# Altium PCB PCB1.PcbDoc
Units mm, origin at the board's own origin, x right, y up, seen from the top; angles counter-clockwise.
Board outline 152.4 x 101.6 mm, 2 copper layers (Top Layer, Bottom Layer); 35 components, 34 nets, 198 pads, 13 vias.
Unrouted connection lines stored in the file: 1.
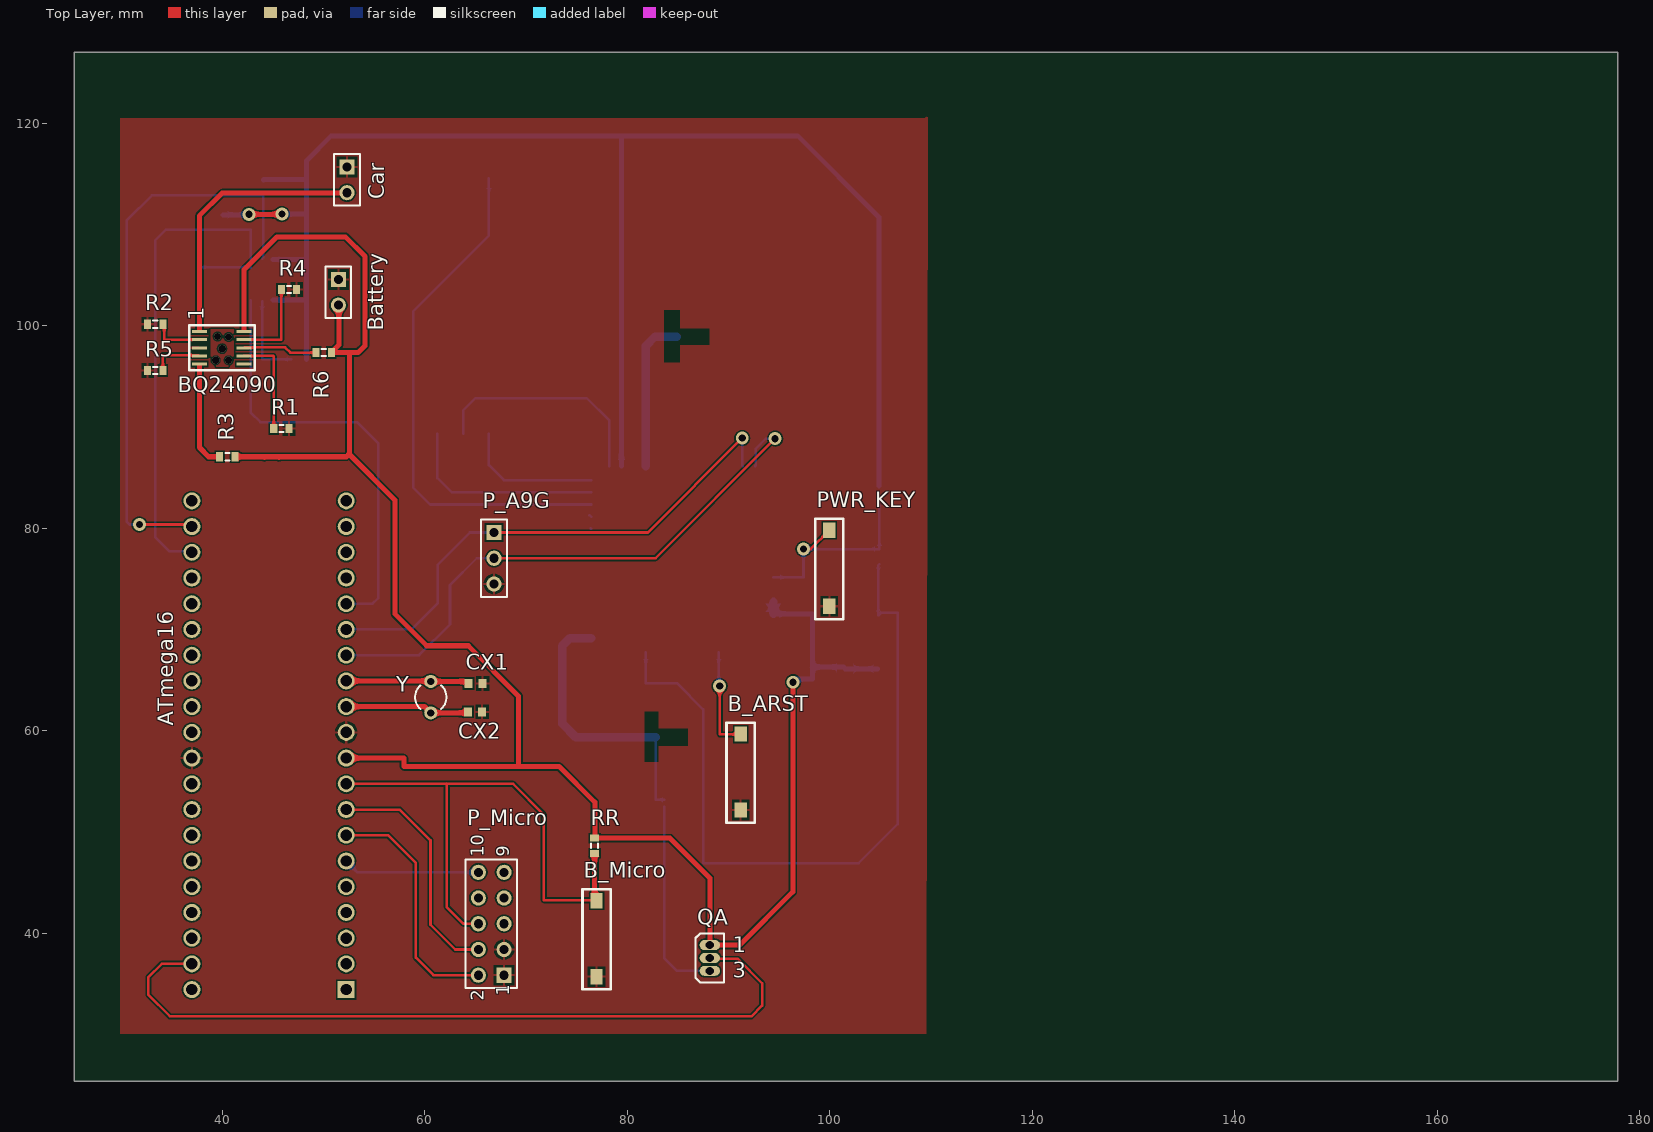
[diagram p0: Top Layer view]
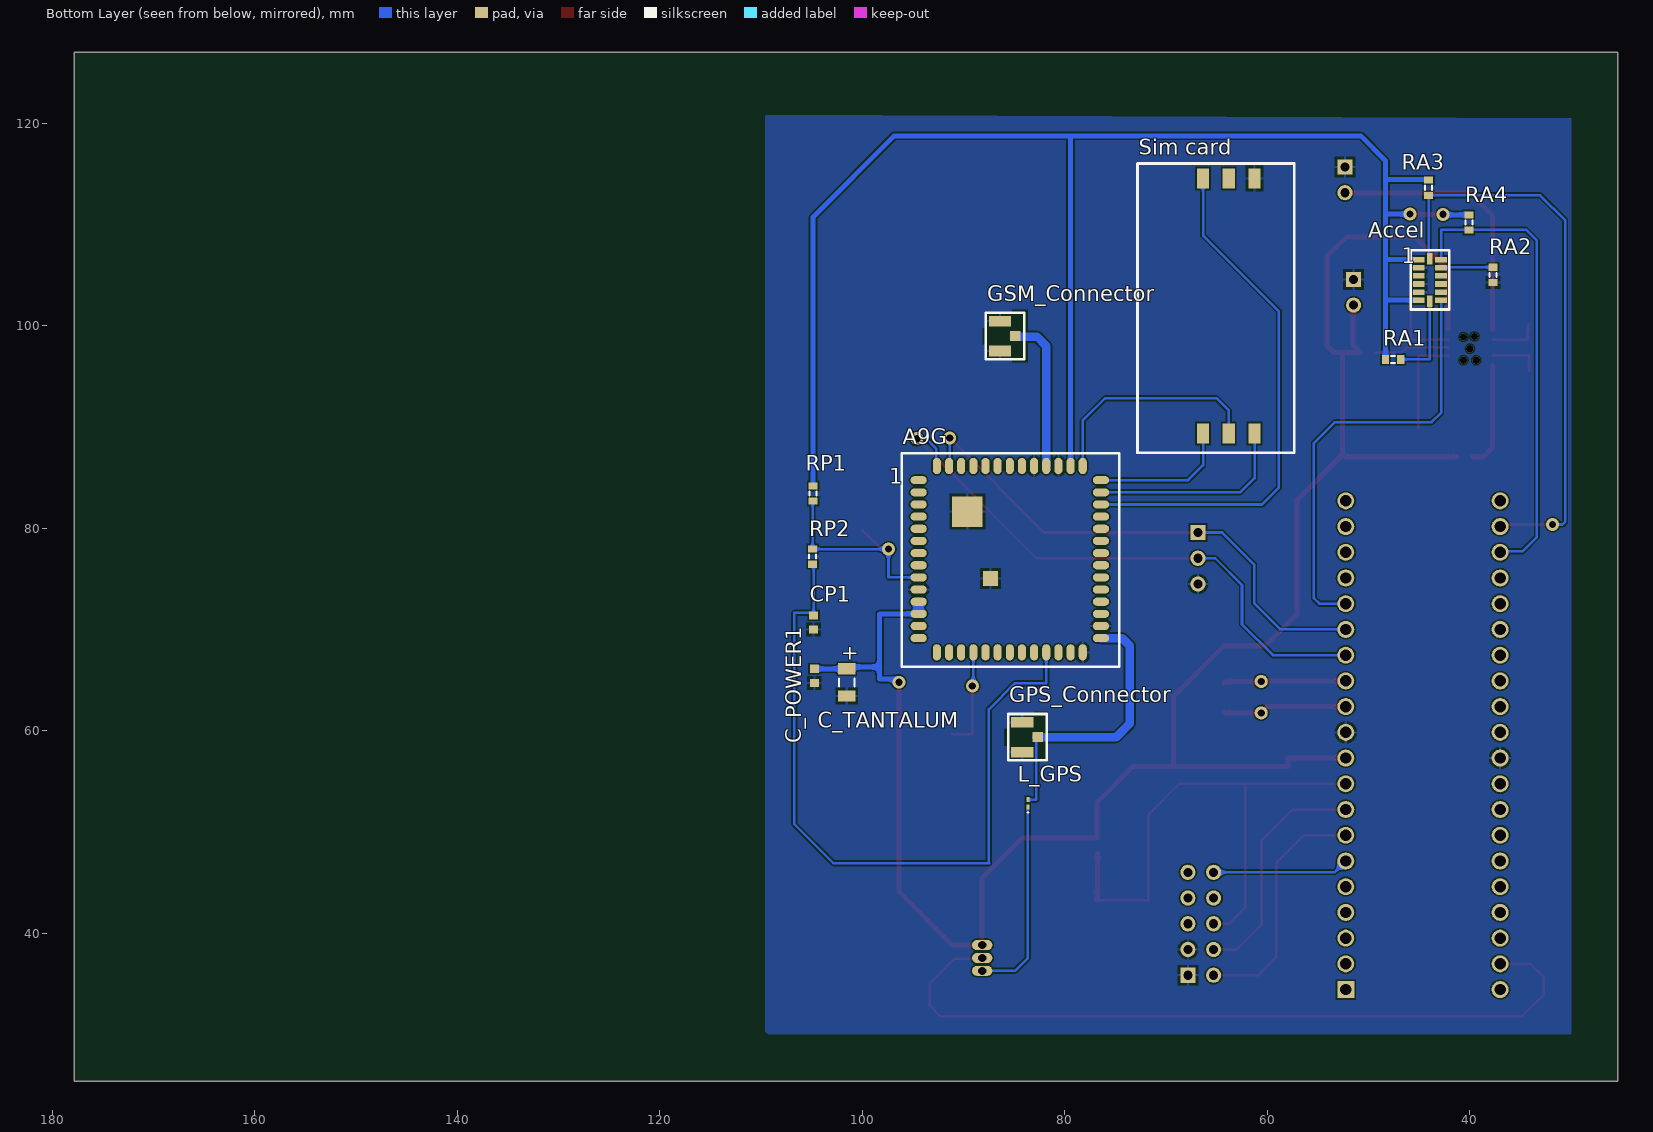
[diagram p1: Bottom Layer view, seen from below]

## Layer stack, top to bottom
Top Solder: solder mask 0.0102, Solder Resist, Dk 3.5
Top Layer: signal copper 0.0356
Dielectric 1: dielectric 0.32, FR-4, Dk 4.8
Bottom Layer: signal copper 0.0356
Bottom Solder: solder mask 0.0102, Solder Resist, Dk 3.5

## Board outline
25.4,25.4 177.8,25.4 177.8,127 25.4,127

## Design rules (kind name [scope] priority, off if disabled: settings)
Clearance [All] p1: gap=0.15 ignorepadtopadclearanceinfootprint=TRUE
PolygonConnect [All] p1: connectstyle=Relief reliefconductorwidth=0.254 reliefentries=4 polygonreliefangle="90 Angle" airgapwidth=0.254
RoutingVias [All] p1: holewidth=0.711 width=1.27 viastyle="Through Hole" minholewidth=0.711 minwidth=1.27 maxholewidth=0.711 maxwidth=1.27
SolderMaskExpansion [All] p1: expansion=0.102
Width [All] p1: maxlimit=0.85 minlimit=0.254 preferedwidth=0.5
30 further rules are at their usual default settings.

## Components (designator, comment, footprint, x,y, rotation, side; value= is the part's Value field where it differs from the comment)
A9G "Component_1" PCBComponent_1#1 106.763,73.828 r180 bottom
Accel "ADXL345" PCBComponent_1#2 43.942,104.521 r180 bottom
ATmega16 "MIC" DIP254P1524X482-40 37.01,82.71 r180 top
B_ARST "Component_1" PCBComponent_1#3 91.2,59.675 r270 top
B_Micro "Component_1" PCBComponent_1#3 76.975,43.225 r270 top
Battery "Header 2" HDR1X2 51.475,104.575 r270 top
BQ24090 "BQ24090" PCBComponent_1#4 37.759,99.423 r270 top
C_POWER1 "Cap Semi" 1608[0603] 104.725,65.425 r90 bottom value=100pF
C_TANTALUM "Cap Semi" C1206 101.525,64.775 r90 bottom value=100miF
Car "Header 2" HDR1X2 52.325,115.675 r270 top
CP1 "Cap Semi" 1608[0603] 104.8,70.7 r90 bottom value=100nF
CX1 "Cap Semi" 1608[0603] 65.025,64.675 r180 top value=22pF
CX2 "Cap Semi" 1608[0603] 64.975,61.875 r180 top value=22pF
GPS_Connector "Component_1" PCBComponent_1#5 82.675,59.375 r90 bottom
GSM_Connector "Component_1" PCBComponent_1#5 84.875,98.975 r90 bottom
L_GPS "Inductor" 0603 83.65,52.85 r90 bottom value=100nH
P_A9G "Header 1" HDR1X3 66.85,79.58 r270 top
P_Micro "Header 5X2" HDR2X5 67.84,35.87 r90 top
PWR_KEY "Component_1" PCBComponent_1#3 99.95,79.8 r270 top
QA "MOSFET-N" E3 88.15,37.57 r0 top
R1 "Res3" J1-0603 45.842,89.86 r0 top value=10K
R2 "Res3" J1-0603 33.396,100.147 r0 top value=1.5K
R3 "Res3" J1-0603 40.508,87.066 r180 top value=1K
R4 "Res3" J1-0603 46.604,103.576 r0 top value=10K
R5 "Res3" J1-0603 33.396,95.575 r0 top value=2K
R6 "Res3" J1-0603 50.033,97.353 r0 top value=2K
RA1 "Res3" J1-0603 47.575,96.675 r180 bottom value=1K
RA2 "Res3" J1-0603 37.719,105.029 r270 bottom value=4.7K
RA3 "Res3" J1-0603 44.075,113.625 r90 bottom value=4.7K
RA4 "Res3" J1-0603 40.1,110.2 r90 bottom value=4.7K
RP1 "Res3" J1-0603 104.85,83.425 r90 bottom value=10K
RP2 "Res3" J1-0603 104.9,77.2 r90 bottom value=1K
RR "Res3" J1-0603 76.775,48.65 r90 top value=10K
"Sim card" "Sim Card Socket" PCBComponent_1#6 61.26,89.35 r90 bottom
Y "XTAL_8MHz" R38 60.6,63.325 r0 top

## Footprints (in the part's own frame and the unit in brackets; to place one, negate y for a bottom-side part, rotate by r counter-clockwise, add the part's x,y. Pads: shape width x height; smd on the part's side, far side on the other; paste and mask are expansions set on the pad)
0603 [mm] "Chip Inductor, Body 0.6x0.3mm, IPC High Density"
  rect 0.5x0.3 smd: 1(-0.35,0) 2(0.35,0)
  silkscreen extent -0.9,-0.05 -0.9,0.05, body extent -0.33,-0.18 0.33,0.18, height 0.55
1608[0603] [mm] "Chip Capacitor, Body 1.6x0.8mm, IPC High Density"
  rect 0.8x0.9 smd: 1(-0.7,0) 2(0.7,0)
  body extent -0.87,-0.48 0.87,0.48, height 1.3
C1206 [mm] "Chip Capacitor, Body 3.2x1.6mm, IPC High Density"
  rect 1.1x1.7 smd: 1(-1.35,0) 2(1.35,0)
  silkscreen extent -0.4,-0.75 0.4,0.75, body extent -1.7,-0.9 1.7,0.9, height 1.3
DIP254P1524X482-40 [mil]
  rect 66x66 hole 44: 1(-600,1900)
  round 66 hole 44: 2(-600,1800) 3(-600,1700) 4(-600,1600) 5(-600,1500) 6(-600,1400) 7(-600,1300) 8(-600,1200) 9(-600,1100) 10(-600,1000) 11(-600,900) 12(-600,800) 13(-600,700) 14(-600,600) 15(-600,500) 16(-600,400) 17(-600,300) 18(-600,200) 19(-600,100) 20(-600,0) 21(0,0) 22(0,100) 23(0,200) 24(0,300) 25(0,400) 26(0,500) 27(0,600) 28(0,700) 29(0,800) 30(0,900) 31(0,1000) 32(0,1100) 33(0,1200) 34(0,1300) 35(0,1400) 36(0,1500) 37(0,1600) 38(0,1700) 39(0,1800) 40(0,1900)
E3 [mm] "TO, Flat Index; 3 In-Line, Axial Leads; Body Dia. 4.6mm; Lead Dia. 0.5 mm (max)"
  oval 2x1 hole 0.8: 1(0,1.27) 2(0,0) 3(0,-1.27)
  silkscreen extent -1.41,-2.41 1.41,2.41
HDR1X2 [mm] "Connector; Header; 2 Position"
  rect 1.5x1.5 hole 0.9: 1(0,0)
  round 1.5 hole 0.9: 2(2.54,0)
  silkscreen extent -1.27,-1.27 3.81,1.27
HDR1X3 [mm] "Connector; Header; 3 Position"
  rect 1.5x1.5 hole 0.9: 1(0,0)
  round 1.5 hole 0.9: 2(2.54,0) 3(5.08,0)
  silkscreen extent -1.27,-1.27 6.35,1.27
HDR2X5 [mm] "Connector; Header; 5x2 Position"
  rect 1.5x1.5 hole 0.9: 1(0,0)
  round 1.5 hole 0.9: 2(0,2.54) 3(2.54,0) 4(2.54,2.54) 5(5.08,0) 6(5.08,2.54) 7(7.62,0) 8(7.62,2.54) 9(10.16,0) 10(10.16,2.54)
  silkscreen extent -1.27,-1.27 11.43,3.81
J1-0603 [mm] "Chip Resistor, Body 1.6x0.8mm, IPC High Density"
  rect 0.7x0.9 smd: 1(-0.75,0) 2(0.75,0)
  silkscreen extent -0.2,-0.35 0.2,0.35, body extent -0.85,-0.48 0.85,0.48, height 0.9
PCBComponent_1#1 [mm]
  oval 1.6x0.8 smd: 1(12.338,10.922) 2(12.338,9.722) 3(12.338,8.522) 4(12.338,7.322) 5(12.338,6.122) 6(12.338,4.922) 7(12.338,3.722) 8(12.338,2.522) 9(12.338,1.322) 10(12.338,0.122) 11(12.338,-1.078) 12(12.338,-2.278) 13(12.338,-3.478) 14(12.338,-4.678) 28(30.338,-4.678) 29(30.338,-3.478) 30(30.338,-2.278) 31(30.338,-1.078) 32(30.338,0.122) 33(30.338,1.322) 34(30.338,2.522) 35(30.338,3.722) 36(30.338,4.922) 37(30.338,6.122) 38(30.338,7.322) 39(30.338,8.522) 40(30.338,9.722) 41(30.338,10.922)
  oval 0.8x1.6 smd: 15(14.138,-6.078) 16(15.338,-6.078) 17(16.538,-6.078) 18(17.738,-6.078) 19(18.938,-6.078) 20(20.138,-6.078) 21(21.338,-6.078) 22(22.538,-6.078) 23(23.738,-6.078) 24(24.938,-6.078) 25(26.138,-6.078) 26(27.338,-6.078) 27(28.538,-6.078) 42(28.538,12.322) 43(27.338,12.322) 44(26.138,12.322) 45(24.938,12.322) 46(23.738,12.322) 47(22.538,12.322) 48(21.338,12.322) 49(20.138,12.322) 50(18.938,12.322) 51(17.738,12.322) 52(16.538,12.322) 53(15.338,12.322) 54(14.138,12.322)
  rect 3x3 smd: 55(17.138,7.822)
  rect 1.5x1.5 smd: 56(19.438,1.222)
  silkscreen extent 10.67,-7.49 32.13,13.59
PCBComponent_1#2 [mm]
  rect 1.145x0.55 smd: 1(-1.098,2) 2(-1.098,1.2) 3(-1.098,0.4) 4(-1.098,-0.4) 5(-1.098,-1.2) 6(-1.098,-2) 8(1.097,-2) 9(1.098,-1.2) 10(1.098,-0.4) 11(1.098,0.4) 12(1.098,1.2) 13(1.098,2)
  rect 0.55x1.145 smd: 7(0,-2.097) 14(0,2.097)
  silkscreen extent -1.91,-2.92 1.91,2.92
PCBComponent_1#3 [mm]
  rect 1.5x1.2 smd: 1(0,0) 2(7.5,0)
  silkscreen extent -1.14,-1.4 8.76,1.4
PCBComponent_1#4 [mm]
  rect 0.3x1.45 smd mask+0.05: 1(0,0) 2(0.8,0) 3(1.6,0) 4(2.4,0) 5(3.2,0) 6(3.2,4.4) 7(2.4,4.4) 8(1.6,4.4) 9(0.8,4.4) 10(0,4.4)
  silkscreen extent -0.63,-1.02 3.81,5.46
PCBComponent_1#5 [mm]
  rect 1.05x2.2 smd: 1(-1.475,1.525) 2(1.475,1.525)
  rect 1x1.05 smd: 3(0,0)
  silkscreen extent -2.29,-0.89 2.29,2.92
PCBComponent_1#6 [mm]
  rect 2x1.2 smd: 1(0,0) 2(0,2.54) 3(0,5.08) 4(25.2,0) 5(25.2,2.54) 6(25.2,5.08)
  silkscreen extent -1.9,-3.94 26.67,11.56
R38 [mm] "Crystal, Thru-Hole; 2 Leads; Body 3.1 x 8.2 mm (Dia.xH)"
  round 1.3 hole 0.7: 1(0,1.55) 2(0,-1.55)
  silkscreen extent -1.55,-1.19 1.55,1.17

## Part data
Accel BQ24090 "Sim card": library part Component_1
ATmega16: library part ATMEGA16A-PU, Package="PDIP-40 Microchip", Availability=Warning, MF=Microchip, Mouser-Purchase-URL=https://snapeda.com/shop?store=Mouser&id=618034, MP=ATMEGA16A-PU, Price=None
Battery Car: "Header, 2-Pin", LatestRevisionDate=17-Jul-2002, LatestRevisionNote="Re-released for DXP Platform.", Publisher="Altium Limited"
C_POWER1 C_TANTALUM CP1 CX1 CX2: "Capacitor (Semiconductor SIM Model)", LatestRevisionDate=29-May-2009, LatestRevisionNote="IPC-7351 Footprint Added.", PackageDescription="Chip Capacitor", PackageReference=C1206, Published=8-Jun-2000, Publisher="Altium Limited"
P_A9G: library part "Header 3", "Header, 3-Pin", LatestRevisionDate=17-Jul-2002, LatestRevisionNote="Re-released for DXP Platform.", Publisher="Altium Limited"
P_Micro: "Header, 5-Pin, Dual row", LatestRevisionDate=17-Jul-2002, LatestRevisionNote="Re-released for DXP Platform.", Publisher="Altium Limited"
QA: "N-Channel MOSFET", LatestRevisionDate=17-Jul-2002, LatestRevisionNote="Re-released for DXP Platform.", PackageDescription="TO, Flat Index; 3 In-Line, Axial Leads; Body Dia. 4.6mm; Lead Dia. 0.5 mm (max)", PackageReference=E3, PackageVersion=1995/1996, Published=8-Jun-2000, Publisher="Altium Limited"
R1 R2 R3 R4 R5 R6 RA1 RA2 RA3 RA4 RP1 RP2 RR: "Resistor", LatestRevisionDate=29-May-2009, LatestRevisionNote="IPC-7351 Footprint Added.", PackageDescription="Chip Resistor", PackageReference=J1-0603, Published=8-Jun-2000, Publisher="Altium Limited"
Y: library part XTAL, "Crystal Oscillator", LatestRevisionDate=17-Jul-2002, LatestRevisionNote="Re-released for DXP Platform.", PackageDescription="Crystal, Thru-Hole; 2 Leads; Body 3.1 x 8.2 mm (Dia.xH)", PackageReference=R38, Published=8-Jun-2000, Publisher="Altium Limited"
L_GPS: Code_IEC=1005, Code_JEITA=0402, LatestRevisionDate=29-May-2009, LatestRevisionNote="IPC-7351 Footprint Added.", PackageDescription="Chip Inductor", PackageReference=0402-A, Published=8-Jun-2000, Publisher="Altium Limited"

## Via types
v1: diameter 1.27, hole 0.711, Top Layer to Bottom Layer, 8 vias
v2: diameter 0.711, hole 0.711, Top Layer to Bottom Layer, 5 vias

## Nets (pads, with @x,y where several pads share a name; then routed paths per layer and width w, separated by ;. In a path a pad name is that pad's centre, name@x,y a point inside that pad or via, vN(x,y) a via of type N, cw(c..) or ccw(c..) an arc to the next point about the centre after c; other vN are vias at no path point)
GND: "Sim card.4" A9G.10 A9G.27 A9G.29 A9G.44 A9G.46 A9G.55 A9G.56 Accel.2 Accel.4 Accel.5 ATmega16.11 ATmega16.31 B_ARST.2 B_Micro.2 Battery.1 BQ24090.3 C_POWER1.1 C_TANTALUM.1 Car.1 CP1.1 CX1.1 CX2.1 GPS_Connector.1 GPS_Connector.2 GSM_Connector.1 GSM_Connector.2 P_A9G.3 P_Micro.1 P_Micro.3 PWR_KEY.2 R1.2 R2.1 R4.2 R5.1 RA2.2
GPS_RF: A9G.28 GPS_Connector.3 L_GPS.2 | length 27.7
  Bottom Layer w0.254: GPS_Connector.3@82.8,59.375 82.8,53.2 L_GPS.2
  Bottom Layer w0.85: A9G.28 74.325,69.15 73.575,68.4 73.575,60.725 74.925,59.375 82.8,59.375 GPS_Connector.3@82.825,59.375
GSM_RF: A9G.45 GSM_Connector.3 | length 15.3
  Bottom Layer w0.85: A9G.45 81.825,98 82.75,98.925 GSM_Connector.3@84.9,98.925
INT: Accel.8 ATmega16.16 | length 43.6
  Bottom Layer w0.254: Accel.8 42.845,91.405 43.775,90.475 53.325,90.475 55.4,88.4 55.4,73.09 54.86,72.55 ATmega16.16
IO29: A9G.24 CP1.2 RP2.1 | length 73.8
  Bottom Layer w0.254: A9G.24 81.825,64.7 84.925,64.7 87.5,62.125 87.5,46.95 87.475,46.925 102.85,46.925 106.7,50.775 106.7,71.65 105.05,71.65 CP1.2 104.8,76.35 RP2.1
M_RX: A9G.54 ATmega16.14 P_A9G.2 | length 57.5
  Top Layer w0.254: P_A9G.2 82.79,77.04 v1(94.6,88.85)
  Bottom Layer w0.254: ATmega16.14 59.445,67.47 62.495,70.52 62.495,74.395 65.14,77.04 P_A9G.2 ; A9G.54 92.675,86.2 92.675,87.85 93.675,88.85 v1(94.6,88.85)
M_TRANS: ATmega16.39 QA.2 | length 76.9
  Top Layer w0.254: ATmega16.39 37,37 34.05,37 32.72,35.67 32.72,33.93 34.825,31.825 34.825,31.8 92.25,31.8 93.325,32.875 93.325,35.075 90.925,37.475 88.245,37.475 QA.2
M_TX: A9G.53 ATmega16.15 P_A9G.1 | length 51.9
  Top Layer w0.254: P_A9G.1 82.03,79.58 v1(91.35,88.9)
  Bottom Layer w0.254: ATmega16.15 58.71,70.01 61.3,72.6 61.3,76.416 64.464,79.58 P_A9G.1 ; v1(91.35,88.9) 91.35,86.225 A9G.53
MISO: ATmega16.7 P_Micro.2 | length 24.3
  Top Layer w0.254: ATmega16.7 52.26,49.7 56.375,49.7 59.125,46.95 59.125,37.6 60.855,35.87 P_Micro.2
MOSI: ATmega16.6 P_Micro.10 | length 13.5
  Bottom Layer w0.254: ATmega16.6 53.37,46.03 P_Micro.10
NetAccel_7: Accel.7 RA1.2 | length 8.6
  Bottom Layer w0.254: Accel.7 43.95,102.416 43.95,96.675 RA1.2
NetAccel_12: Accel.12 RA2.1 | length 5.1
  Bottom Layer w0.254: RA2.1 42.786,105.779 Accel.12
NetBQ24090_2: BQ24090.2 R2.2 | length 5.1
  Top Layer w0.254: R2.2 34.285,100.008 34.285,98.623 BQ24090.2
NetBQ24090_4: BQ24090.4 R5.2 | length 5.2
  Top Layer w0.254: R5.2 34.146,97.087 34.158,97.099 37.683,97.099 BQ24090.4
NetBQ24090_5: BQ24090.5 R3.2 | length 10.5
  Top Layer w0.5: BQ24090.5@37.759,96.083 37.759,87.966 38.659,87.066 R3.2
NetBQ24090_7: BQ24090.7 R1.1 | length 10.1
  Top Layer w0.254: BQ24090.7 45.029,97.023 45.092,96.96 R1.1
NetBQ24090_8: BQ24090.8 R6.1 | length 7.4
  Top Layer w0.254: BQ24090.8 42.197,97.861 46.223,97.861 46.731,97.353 R6.1
NetBQ24090_9: BQ24090.9 R4.1 | length 8.5
  Top Layer w0.254: BQ24090.9 45.842,98.623 45.842,103.437 R4.1@45.854,103.449
PWR_KEY: A9G.9 PWR_KEY.1 RP1.1 RP2.2 | length 21.4
  Top Layer w0.254: v1(97.4,77.95) 98.1,77.95 PWR_KEY.1
  Bottom Layer w0.254: A9G.9 97.4,75.15 v1(97.4,77.95) RP2.2 104.9,82.675 RP1.1
RESET: A9G.18 B_ARST.1 | length 10.1
  Top Layer w0.254: v1(89.125,64.425) 89.125,59.65 B_ARST.1@91.125,59.65
  Bottom Layer w0.254: A9G.18 89.025,64.525 v1(89.125,64.425)
RST: ATmega16.9 B_Micro.1 P_Micro.6 RR.1 | length 55.1
  Top Layer w0.254: ATmega16.9 62.175,54.77 62.175,42.6 63.8,40.975 63.8,40.95 P_Micro.6 ; 62.15,54.775 68.725,54.775 71.75,51.75 71.75,43.275 B_Micro.1@76.925,43.275
  Top Layer w0.5: RR.1 76.775,43.425 B_Micro.1@76.925,43.275
SCK: ATmega16.8 P_Micro.4 | length 23.7
  Top Layer w0.254: ATmega16.8 52.255,52.225 57.525,52.225 60.575,49.175 60.575,40.85 63.015,38.41 P_Micro.4
SCL: Accel.14 ATmega16.22 RA3.1 | length 57.2
  Top Layer w0.254: v1(31.825,80.375) 36.805,80.375 ATmega16.22
  Bottom Layer w0.254: v1(31.825,80.375) 30.85,80.375 30.6,80.625 30.6,110.425 33.05,112.875 RA3.1 44.075,106.751 Accel.14
SDA: Accel.13 ATmega16.23 RA4.1 | length 46.4
  Bottom Layer w0.254: ATmega16.23 36.915,77.725 34.8,77.725 33.375,79.15 33.375,108.397 34.464,109.486 42.844,109.486 Accel.13
SIM_CLK: "Sim card.3" A9G.41 | length 13.8
  Bottom Layer w0.254: 66.34,89.35 66.34,86.235 67.825,84.75 A9G.41
SIM_IO: "Sim card.6" A9G.39 | length 51.9
  Bottom Layer w0.254: 66.34,114.55 66.34,108.915 58.85,101.425 58.85,84.025 60.525,82.35 A9G.39
SIM_RST: "Sim card.2" A9G.42 | length 22.6
  Bottom Layer w0.254: 63.8,89.35 63.8,91.625 65.025,92.85 76,92.85 78.225,90.625 A9G.42
TRANS: L_GPS.1 QA.3 | length 20.1
  Bottom Layer w0.254: L_GPS.1 83.65,37.55 84.9,36.3 QA.3 QA.3@88.025,36.425
V_BAT: A9G.11 A9G.12 ATmega16.10 Battery.2 BQ24090.10 C_POWER1.2 C_TANTALUM.2 QA.1 R3.1 R6.2 RR.2 | length 200.4
  Top Layer w0.5: R3.1 44.075,87.066 ; 42.159,99.639 42.159,105.534 45.408,108.783 52.167,108.783 54.097,106.853 54.097,98.022 53.428,97.353 52.446,97.353 ; 44.16,86.981 44.075,87.066 ; 45.61,86.976 45.7,87.066 ; Battery.2@51.525,102.035 51.525,98.095 R6.2 52.446,97.353 ; ATmega16.10 57.94,57.31 57.95,57.3 57.95,56.475 69.25,56.475 ; 52.573,87.277 57.05,82.8 57.05,71.55 60.2,68.4 64.3,68.4 69.25,63.45 69.25,56.475 ; v1(96.375,64.8) 96.35,64.775 96.35,44.1 91.09,38.84 QA.1 88.15,45.475 84.225,49.4 RR.2 76.8,49.425 76.8,52.95 73.275,56.475 69.25,56.475 ; 44.075,87.066 45.7,87.066 ; 45.7,87.066 52.266,87.066 52.573,87.373 52.573,97.226 52.446,97.353
  Bottom Layer w0.5: A9G.12 98.275,71.55 98.275,66.3 ; v1(96.375,64.8) 96.675,65.1 98.275,65.1 98.275,66.3 ; C_POWER1.2 C_TANTALUM.2 101.35,66.3 98.275,66.3
  Bottom Layer w0.8: A9G.12 A9G.11
V_IN: BQ24090.1 Car.2 | length 26.9
  Top Layer w0.5: 37.759,99.639 37.759,110.85 37.751,110.85 40.002,113.101 Car.2@52.475,113.101
V_IO: A9G.43 Accel.1 Accel.6 RA1.1 RA3.2 RA4.2 RP1.2 | length 158.9
  Top Layer w0.5: v1(42.65,111) 45.9,111 v1(45.9,111.025)
  Bottom Layer w0.5: RA4.2 42.65,110.95 v1(42.65,111) ; RA3.2 44.075,114.45 48.325,114.45 ; Accel.6 48.304,102.521 48.325,102.5 ; Accel.1 48.279,106.521 48.325,106.475 ; v1(45.9,111.025) 48.325,111.025 ; RA1.1 48.325,102.5 ; A9G.43 79.425,118.75 ; RP1.2 104.85,110.725 96.825,118.75 79.425,118.75 ; 48.325,102.5 48.325,106.475 ; 48.325,106.475 48.325,111.025 ; 48.325,111.025 48.325,114.45 ; 48.325,114.45 48.325,116.3 50.775,118.75 79.425,118.75
V_SIM: "Sim card.1" A9G.40 | length 20.1
  Bottom Layer w0.254: 61.26,89.35 61.26,84.965 62.675,83.55 A9G.40
XTAL1: ATmega16.13 CX1.2 Y.1 | length 12.2
  Top Layer w0.5: ATmega16.13 60.545,64.93 Y.1 64.125,64.875 CX1.2
XTAL2: ATmega16.12 CX2.2 Y.2 | length 12.3
  Top Layer w0.5: ATmega16.12 59.985,62.39 Y.2 64.175,61.775 CX2.2
pads on no net: "Sim card.5" A9G.1 A9G.2 A9G.3 A9G.4 A9G.5 A9G.6 A9G.7 A9G.8 A9G.13 A9G.14 A9G.15 A9G.16 A9G.17 A9G.19 A9G.20 A9G.21 A9G.22 A9G.23 A9G.25 A9G.26 A9G.30 A9G.31 A9G.32 A9G.33 A9G.34 A9G.35 A9G.36 A9G.37 A9G.38 A9G.47 A9G.48 A9G.49 A9G.50 A9G.51 A9G.52 Accel.3 Accel.9 Accel.10 Accel.11 ATmega16.1 ATmega16.2 ATmega16.3 ATmega16.4 ATmega16.5 ATmega16.17 ATmega16.18 ATmega16.19 ATmega16.20 ATmega16.21 ATmega16.24 ATmega16.25 ATmega16.26 ATmega16.27 ATmega16.28 ATmega16.29 ATmega16.30 ATmega16.32 ATmega16.33 ATmega16.34 ATmega16.35 ATmega16.36 ATmega16.37 ATmega16.38 ATmega16.40 BQ24090.6 P_Micro.5 P_Micro.7 P_Micro.8 P_Micro.9
copper on no net: | length 0.3
  Bottom Layer w0.254: 76.27,81.305 76.425,81.15 ; 76.375,80 76.425,79.95
  other v2: 39.365,96.591 40.635,96.591 40,97.734 40.635,98.877 39.55,98.95

## Polygon pours and split planes (outlines as drawn)
GND on Top Layer "GND_Bottom" (solid, pour order 40): 109.65,120.75 109.4,120.5 29.975,120.5 29.95,120.475 29.95,30.075 29.975,30.1 109.5,30.1
no net on Top Layer "Thermal Pad" (solid, pour order 2): 38.857,95.956 38.857,99.639 41.143,99.639 41.143,95.956
GND on Bottom Layer "GND_Bottom" (solid, pour order 36): 109.6,120.85 109.55,120.8 109.55,30.3 109.3,30.05 29.85,30.05 30,30.2 30,120.475

## Other copper
Top Layer:
  pour cut-out: 83.075,61.9 83.075,60.2 85.975,60.2 85.975,58.55 83.075,58.55 83.075,56.925 81.75,56.925 81.75,61.9
  pour cut-out: 85.2,101.55 85.2,99.725 88.075,99.725 88.075,98.125 85.175,98.125 85.175,96.375 83.65,96.375 83.65,101.55
Bottom Layer:
  pour cut-out: 83.075,61.9 83.075,60.2 85.975,60.2 85.975,58.55 83.075,58.55 83.075,56.925 81.75,56.925 81.75,61.9
  pour cut-out: 85.2,101.575 85.2,99.75 88.075,99.75 88.075,98.15 85.175,98.15 85.175,96.4 83.65,96.4 83.65,101.575

## Silkscreen, mask and mechanical layers (free items; w line width, h text height)
Top Overlay:
  text "1" at 38.2,100.55 h1.52 r90
Bottom Overlay:
  text "1" at 46.725,106.15 h1.52
  text "1" at 97.35,84.375 h1.52
  text "+" at 102.05,67 h1.52
Mechanical 1:
  lines w0.254: 29.825,29.95 109.65,29.95 109.65,120.675 29.825,120.675 29.825,29.95

## Text inside footprints (layer, text, board x,y; h text height)
P_Micro: Top Overlay "10" at 65.808,47.554 h1.27 r90; Top Overlay "9" at 68.348,47.554 h1.27 r90; Top Overlay "1" at 68.348,33.838 h1.27 r90; Top Overlay "2" at 65.808,33.33 h1.27 r90
QA: Top Overlay "3" at 90.425,35.607 h1.5; Top Overlay "1" at 90.425,38.125 h1.5